# Altium PCB floppy_m0dule.PcbDoc
Units mil, origin at the board's own origin, x right, y up, seen from the top; angles counter-clockwise.
Board outline 1968.5 x 1968.5 mil, 2 copper layers (Top Layer, Bottom Layer); 22 components, 26 nets, 143 pads, 0 vias.
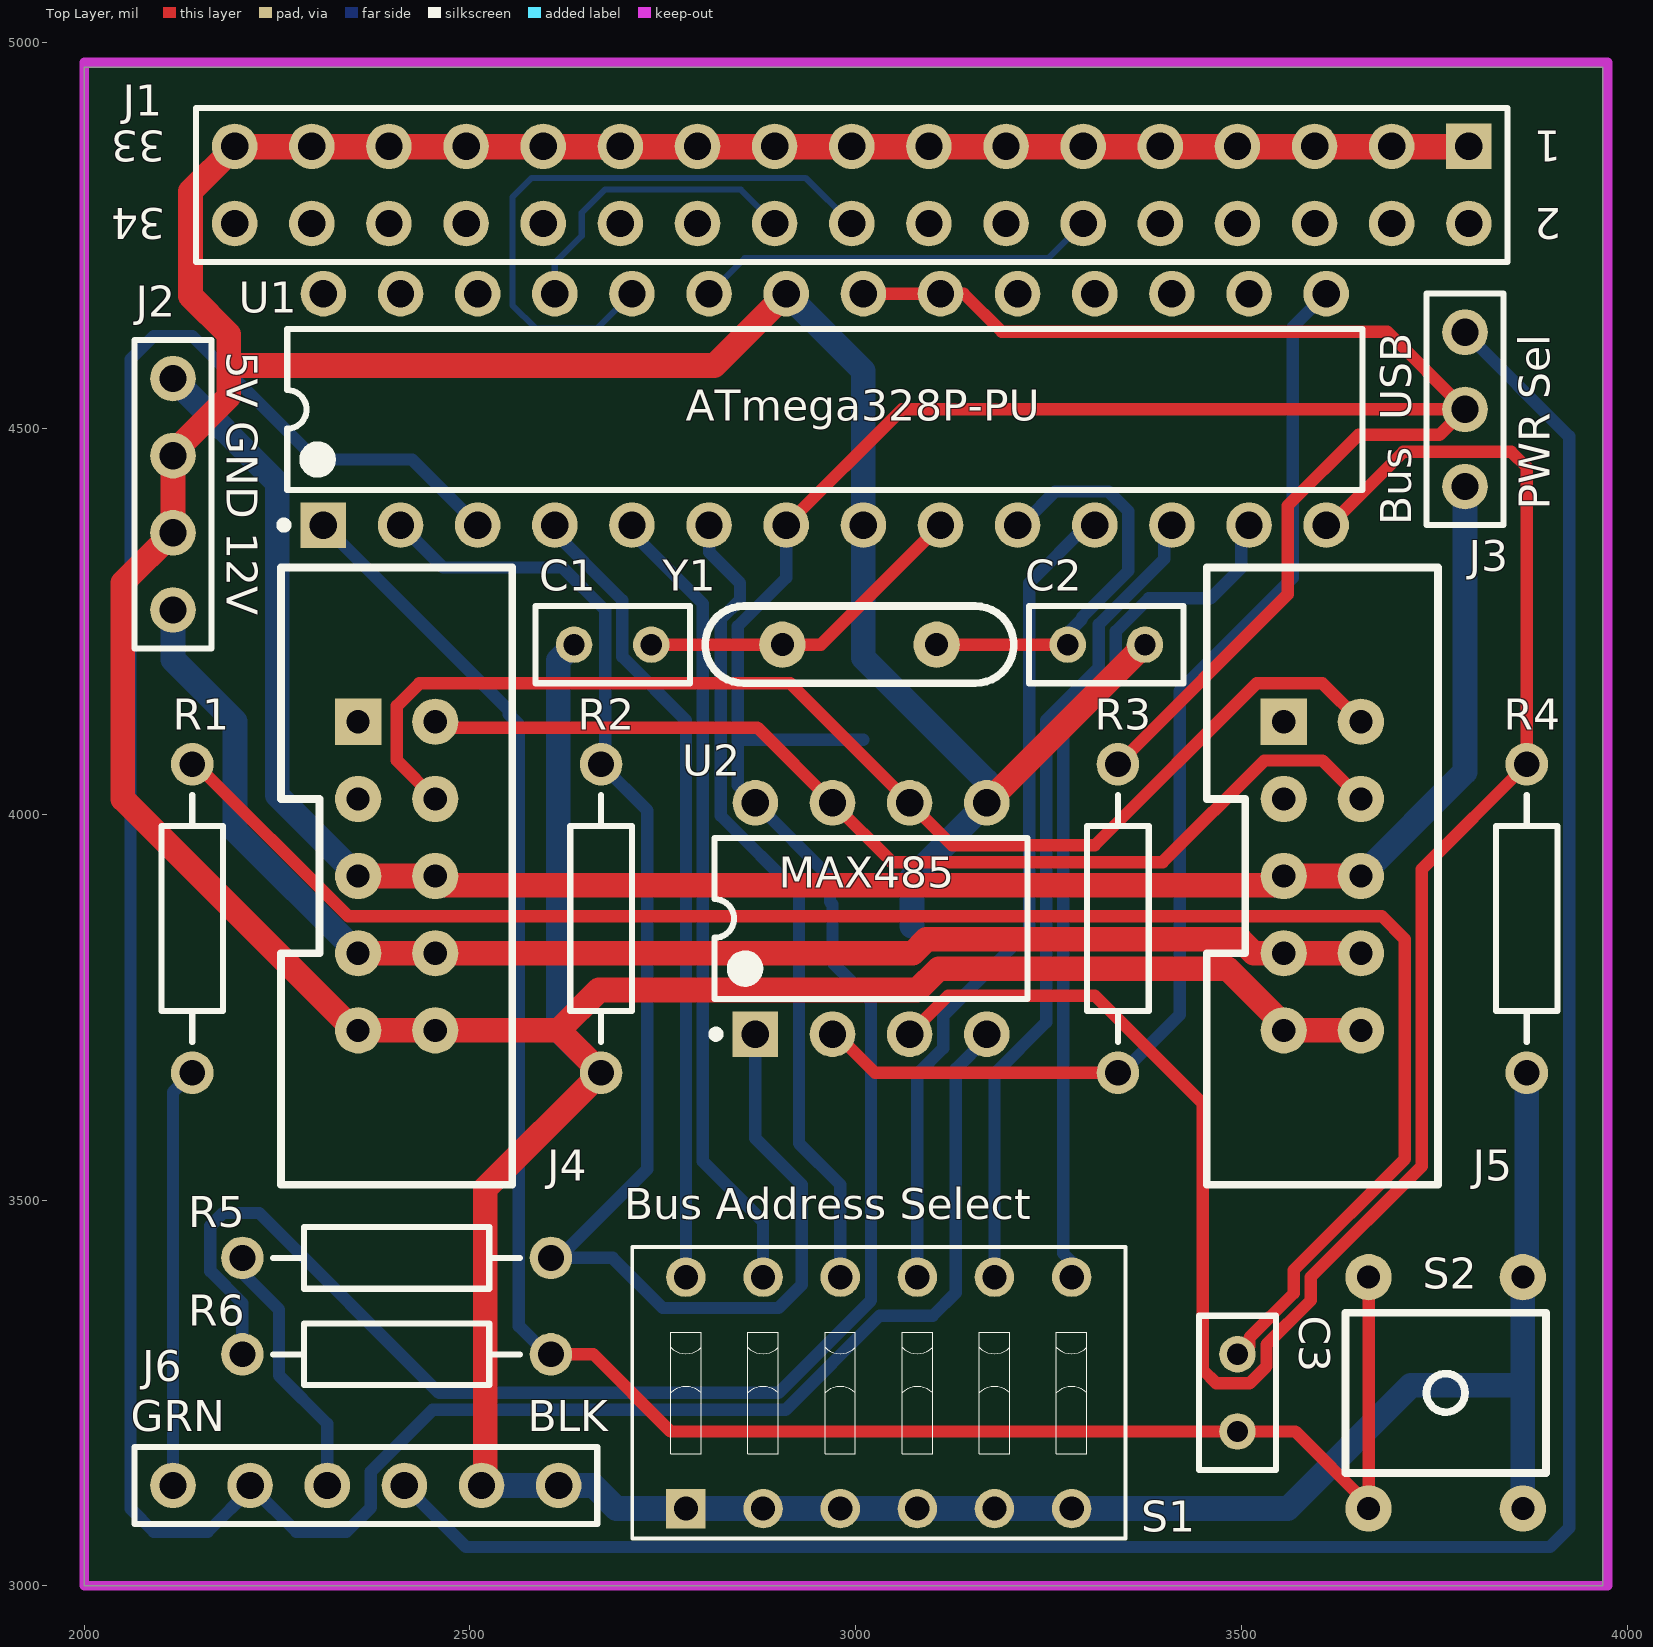
[diagram p0: Top Layer view]
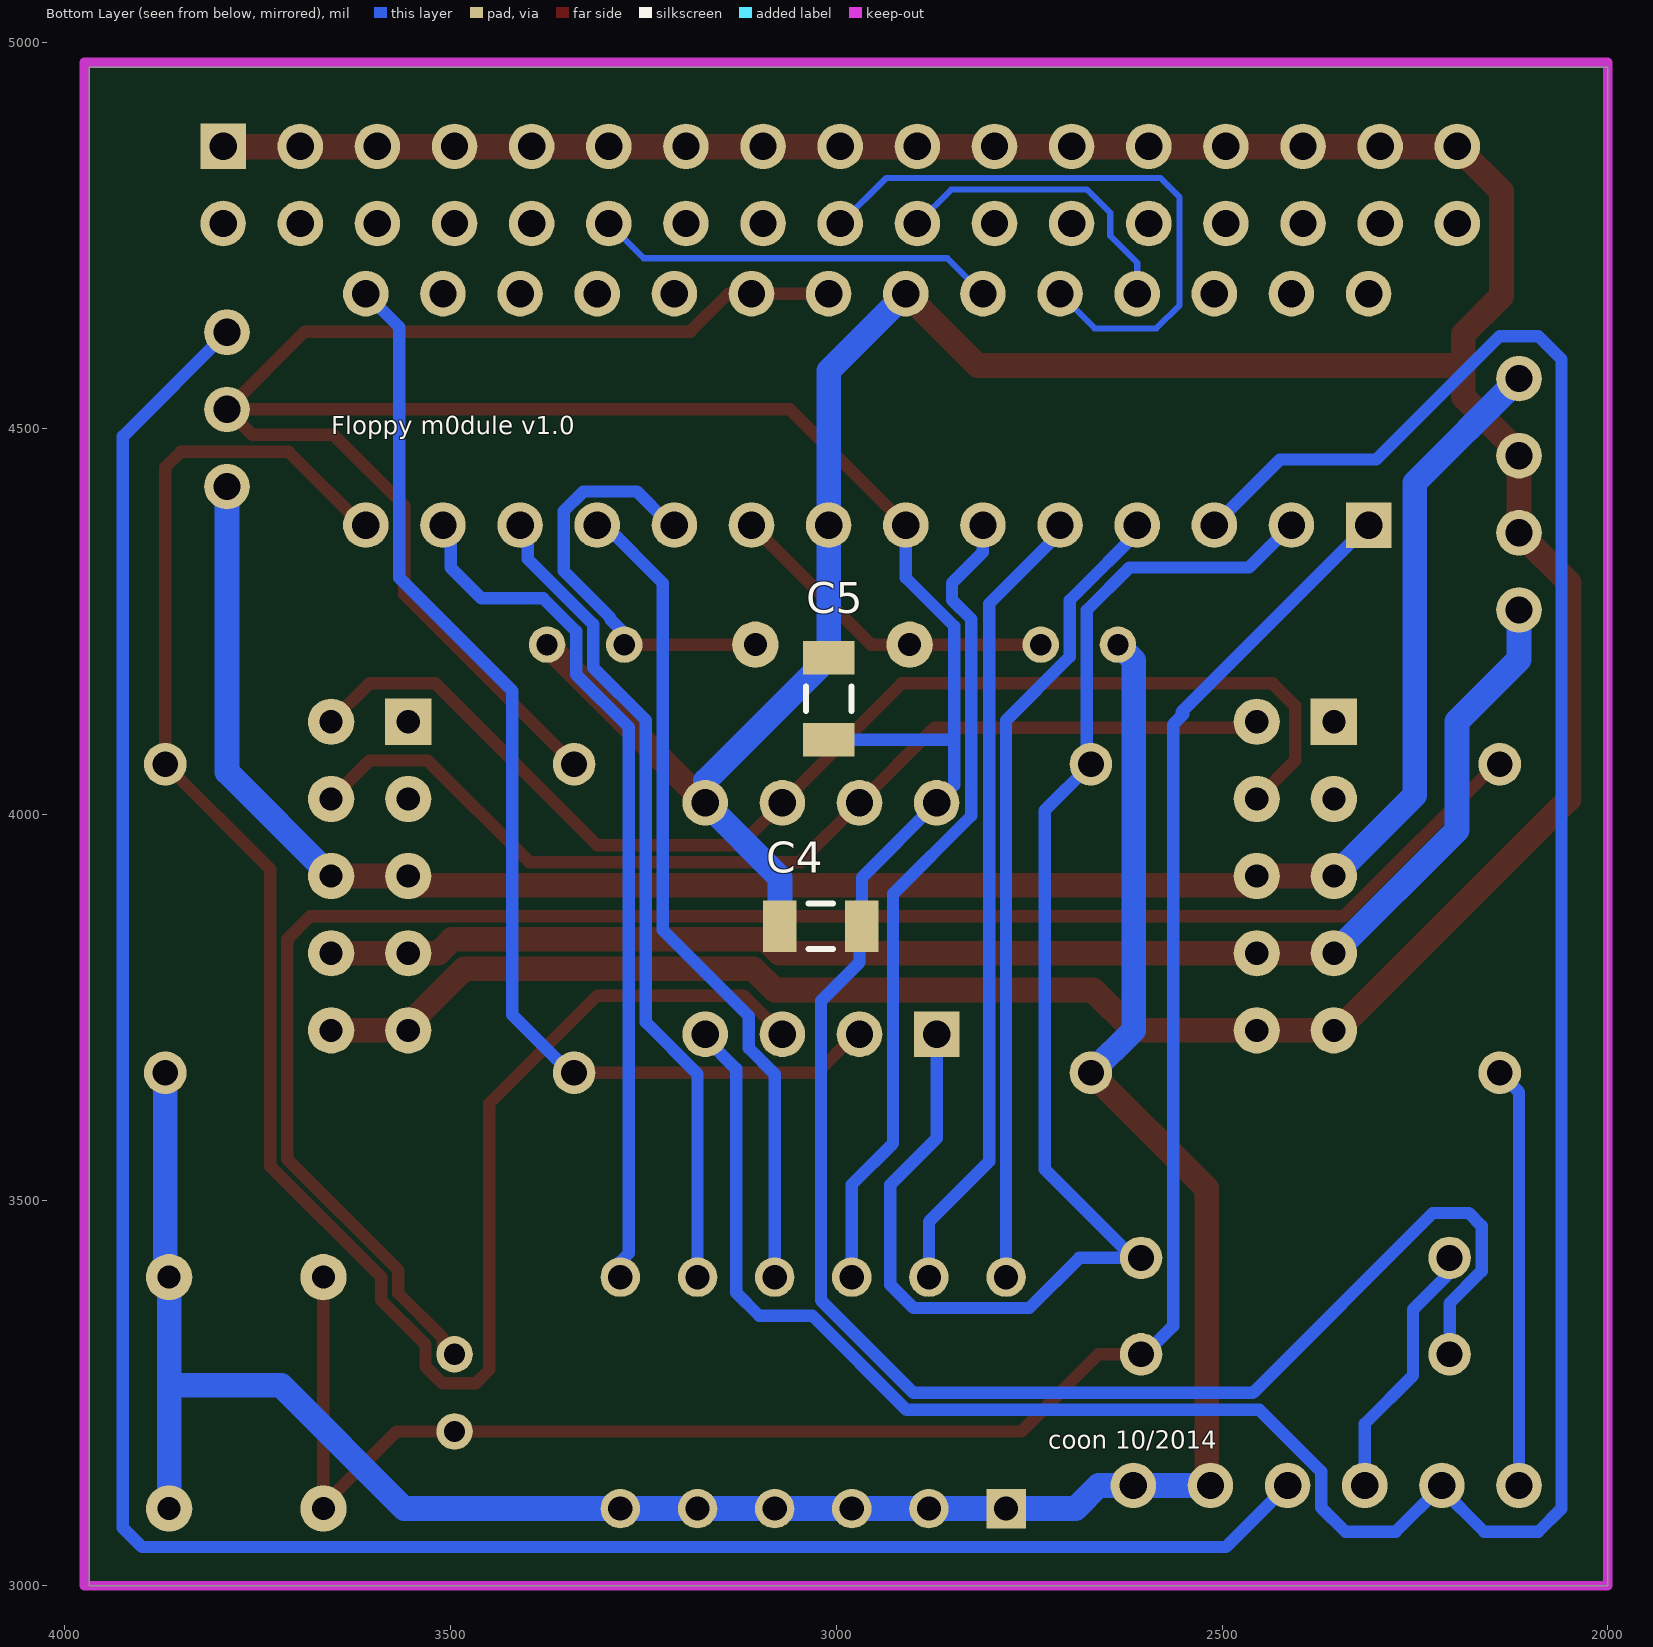
[diagram p1: Bottom Layer view, seen from below]
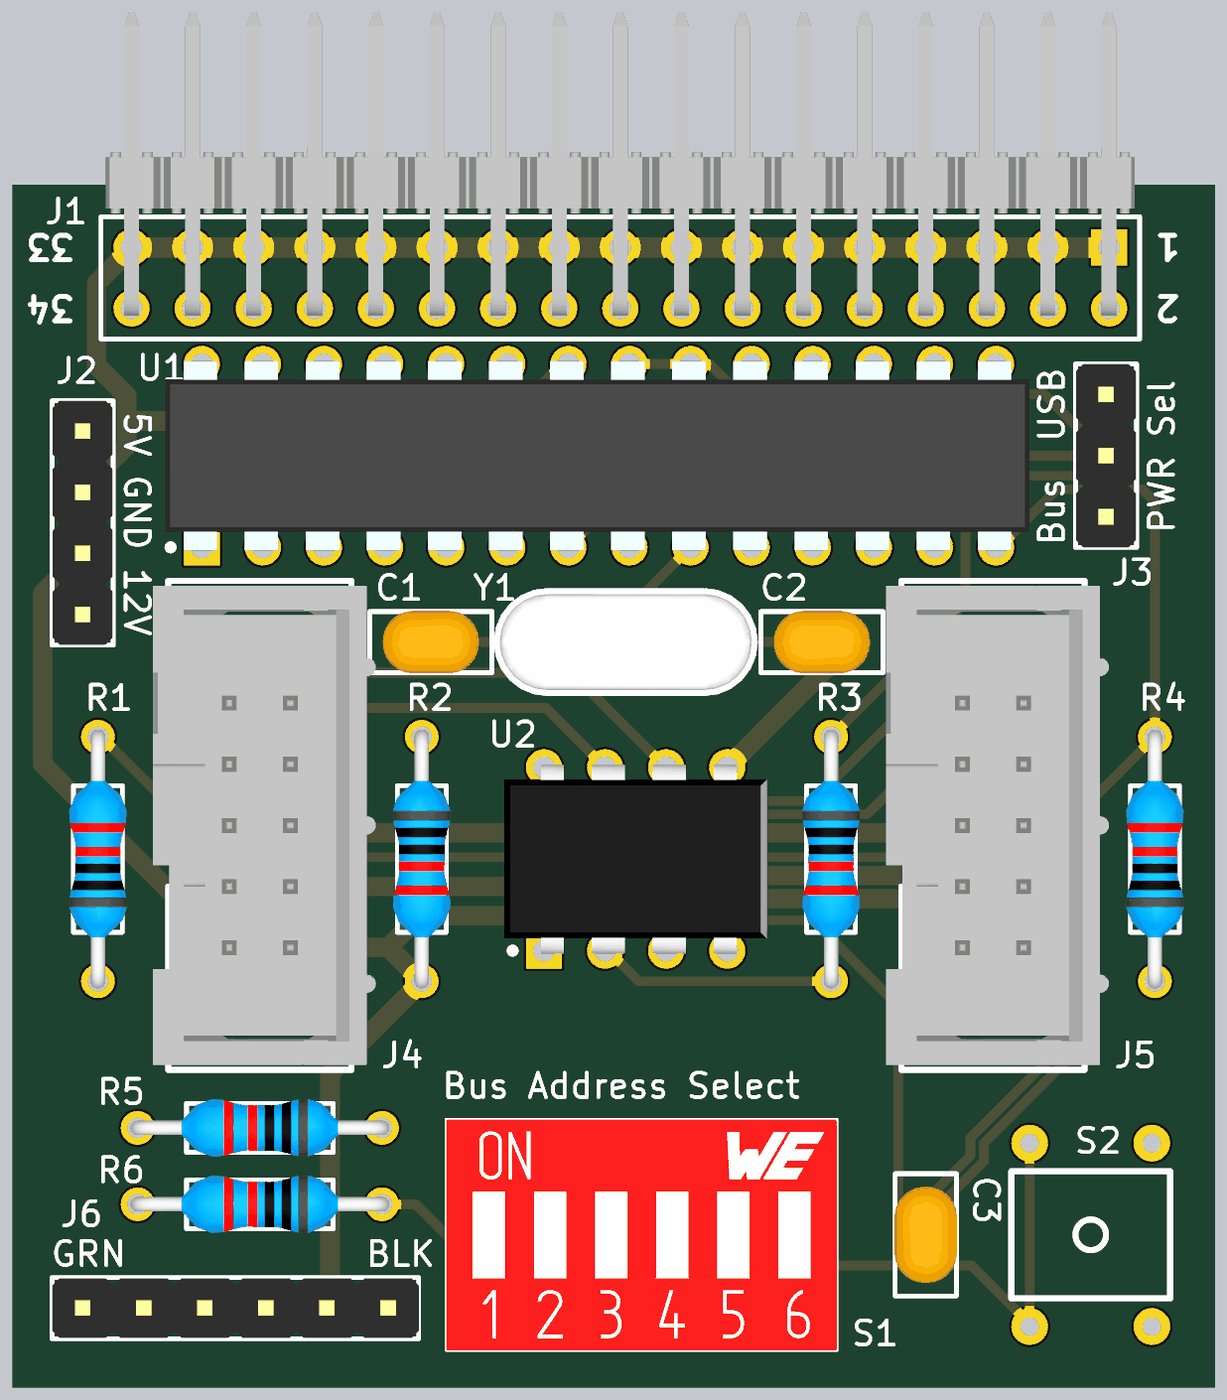
[diagram p2: 3D render of the assembled board from above, using the file's embedded part models]

## Layer stack, top to bottom
Top Solder: solder mask 0.4, Solder Resist, Dk 3.5
Top Layer: signal copper 1.4
Dielectric 1: dielectric 12.6, FR-4, Dk 4.8
Bottom Layer: signal copper 1.4
Bottom Solder: solder mask 0.4, Solder Resist, Dk 3.5

## Board outline
2000,3000 3968.5,3000 3968.5,4968.5 2000,4968.5

## Design rules (kind name [scope] priority, off if disabled: settings)
Clearance [All] p1: gap=6
HoleToHoleClearance [All] p1: gap=6 allowstackedmicrovias=TRUE
MinimumSolderMaskSliver [All] p1: minsoldermaskwidth=5.12
PolygonConnect [All] p1: connectstyle=Relief reliefconductorwidth=10 reliefentries=4 polygonreliefangle="90 Angle" airgapwidth=10
RoutingVias [All] p1: holewidth=31.5 width=62.99 viastyle="Through Hole" minholewidth=28 minwidth=50 maxholewidth=28 maxwidth=50
SilkToSolderMaskClearance [IsPad] p1: minsilkscreentomaskgap=7 clearancetoexposedcopper=TRUE
SolderMaskExpansion [All] p1: expansion=4
Width "Floppy Power Width" [InNetClass('Floppy Power')] p1: maxlimit=32 minlimit=16 preferedwidth=32
Width "Chip Power Width" [InNetClass('Chip Power')] p2: maxlimit=16 minlimit=16 preferedwidth=16 minimp=50.000000 maximp=50.000000 favimp=50.000000
Width [All] p3: maxlimit=24 minlimit=6 preferedwidth=16
26 further rules are at their usual default settings.

## Classes and differential pairs
net class "Floppy Power": "BUS +5V" "BUS +12V" GND
net class "Chip Power": "+5 FTDI" VCC

## Components (designator, comment, footprint, x,y, rotation, side; value= is the part's Value field where it differs from the comment)
C1 "Cap" RAD-0.1 2685,4220 r180 top
C2 "Cap" RAD-0.1 3325,4220 r0 top
C3 "PoR Cap" RAD-0.1 3495,3250 r270 top
C4 "Buffer Cap" C1206 3020,3855 r0 bottom
C5 "Buffer Cap" C1206 3010,4150 r90 bottom
J1 "Shugart Floppy Connector" HDR2X17 3795,4866 r180 top
J2 "Molex Connector" HDR1X4 2115,4565 r270 top
J3 "Power Select Jumper" HDR1X3 3790,4425 r90 top
J4 "Floppy Bus Left" "SHROUDED PINHEADER 2X5" 2355,4120 r0 top
J5 "Floppy Bus Right" "SHROUDED PINHEADER 2X5" 3555,4120 r0 top
J6 "FTDI" HDR1X6 2115,3130 r0 top
R1 "" AXIAL-0.4 2140,3865 r90 top
R2 "Pulldown" AXIAL-0.4 2670,3865 r270 top
R3 "Pullup" AXIAL-0.4 3340,3865 r270 top
R4 "Pulldown" AXIAL-0.4 3870,3865 r90 top
R5 "Shortcut protection" AXIAL-0.4 2405,3425 r180 top
R6 "Pullup" AXIAL-0.4 2405,3300 r180 top
S1 "Bus Address Select" 418117170906 3030,3250 r0 top
S2 "SW-DPST" "PCBComponent_1 - duplicate" 3765,3250 r180 top
U1 "ATmega328P-PU" 28P3 2960,4525 r90 top
U2 "MAX485" PA8 3020,3865 r90 top
Y1 "20Mhz" CRYSTAL 3005,4220 r180 top

## Footprints (in the part's own frame and the unit in brackets; to place one, negate y for a bottom-side part, rotate by r counter-clockwise, add the part's x,y. Pads: shape width x height; smd on the part's side, far side on the other; paste and mask are expansions set on the pad)
28P3 [mm] "DIP, 28-Leads, Row Spacing 7.62mm, Pitch 2.54mm, Body 34.67x7.3mm"
  rect 1.5x1.5 hole 0.9: 1(-3.81,16.51)
  round 1.5 hole 0.9: 2(-3.81,13.97) 3(-3.81,11.43) 4(-3.81,8.89) 5(-3.81,6.35) 6(-3.81,3.81) 7(-3.81,1.27) 8(-3.81,-1.27) 9(-3.81,-3.81) 10(-3.81,-6.35) 11(-3.81,-8.89) 12(-3.81,-11.43) 13(-3.81,-13.97) 14(-3.81,-16.51) 15(3.81,-16.51) 16(3.81,-13.97) 17(3.81,-11.43) 18(3.81,-8.89) 19(3.81,-6.35) 20(3.81,-3.81) 21(3.81,-1.27) 22(3.81,1.27) 23(3.81,3.81) 24(3.81,6.35) 25(3.81,8.89) 26(3.81,11.43) 27(3.81,13.97) 28(3.81,16.51)
  silkscreen extent -3.93,-17.7 2.65,17.93, body extent -3.94,-17.91 3.94,18.03, height 4.57
418117170906 [mm] "06p, 2.54mm Pitch, Horizontal, Box Type, THT, flat Actuator, red, without Tape, Tube"
  rect 1.3x1.3 hole 0.8: 1(-6.35,-3.81)
  round 1.3 hole 0.8: 2(-3.81,-3.81) 3(-1.27,-3.81) 4(1.27,-3.81) 5(3.81,-3.81) 6(6.35,-3.81) 7(6.35,3.81) 8(3.81,3.81) 9(1.27,3.81) 10(-1.27,3.81) 11(-3.81,3.81) 12(-6.35,3.81)
  silkscreen extent -8.12,-4.8 8.12,4.8, body extent -8.12,-4.8 8.12,4.8, height 5.4
AXIAL-0.4 [mm] "Axial Device, Thru-Hole; 2 Leads; 0.4 in Pin Spacing"
  round 1.4 hole 0.85: 1(-5.08,0) 2(5.08,0)
  silkscreen extent -4.06,-1.02 4.06,1.02, body extent -5.38,-1.2 5.38,1.2, height 2.47
C1206 [mm] "Chip Capacitor, Body 3.2x1.6mm, IPC High Density"
  rect 1.1x1.7 smd: 1(1.35,0) 2(-1.35,0)
  silkscreen extent -0.4,-0.75 0.4,0.75, body extent -1.6,-0.8 1.6,0.8, height 1.6
CRYSTAL [mil]
  round 60 hole 30: 1(-100,0) 2(100,0)
  silkscreen extent -200,-50 200,50, body extent -215,-88 217,88, height 142
HDR1X3 [mm] "Connector; Header; 3 Position"
  round 1.5 hole 0.9: 1(0,0) 2(2.54,0) 3(5.08,0)
  silkscreen extent -1.27,-1.27 6.35,1.27, body extent -1.27,-1.24 6.35,1.24, height 8.54
HDR1X4 [mm] "Connector; Header; 4 Position"
  round 1.5 hole 0.9: 1(0,0) 2(2.54,0) 3(5.08,0) 4(7.62,0)
  silkscreen extent -1.27,-1.27 8.89,1.27, body extent -1.27,-1.24 8.89,1.25, height 8.54
HDR1X6 [mm] "Connector; Header; 6 Position"
  round 1.5 hole 0.9: 1(0,0) 2(2.54,0) 3(5.08,0) 4(7.62,0) 5(10.16,0) 6(12.7,0)
  silkscreen extent -1.27,-1.27 13.97,1.27, body extent -1.27,-1.24 13.97,1.25, height 8.54
HDR2X17 [mm] "Connector; Header; 17x2 Position"
  rect 1.5x1.5 hole 0.9: 1(0,0)
  round 1.5 hole 0.9: 2(0,2.54) 3(2.54,0) 4(2.54,2.54) 5(5.08,0) 6(5.08,2.54) 7(7.62,0) 8(7.62,2.54) 9(10.16,0) 10(10.16,2.54) 11(12.7,0) 12(12.7,2.54) 13(15.24,0) 14(15.24,2.54) 15(17.78,0) 16(17.78,2.54) 17(20.32,0) 18(20.32,2.54) 19(22.86,0) 20(22.86,2.54) 21(25.4,0) 22(25.4,2.54) 23(27.94,0) 24(27.94,2.54) 25(30.48,0) 26(30.48,2.54) 27(33.02,0) 28(33.02,2.54) 29(35.56,0) 30(35.56,2.54) 31(38.1,0) 32(38.1,2.54) 33(40.64,0) 34(40.64,2.54)
  silkscreen extent -1.27,-1.27 41.91,3.81, body extent -1.07,-9.78 41.71,2.85, height 5.79
PA8 [mm] "DIP, 8-Leads, Row Spacing 7.62mm, Pitch 2.54mm, Body 9.38x7.24mm"
  rect 1.5x1.5 hole 0.9: 1(-3.81,3.81)
  round 1.5 hole 0.9: 2(-3.81,1.27) 3(-3.81,-1.27) 4(-3.81,-3.81) 5(3.81,-3.81) 6(3.81,-1.27) 7(3.81,1.27) 8(3.81,3.81)
  silkscreen extent -3.93,-5.15 2.65,5.23, body extent -3.93,-5.46 3.94,5.46, height 5.08
"PCBComponent_1 - duplicate" [mil]
  round 60 hole 30: 1(100,-150) 2(-100,-150) 3(100,150) 4(-100,150)
  silkscreen extent -130,-104 130,104
RAD-0.1 [mm] "Radial Cap, Thru-Hole; 2 Leads; 0.1 in Pin Spacing"
  round 1.2 hole 0.7: 1(-1.27,0) 2(1.27,0)
  silkscreen extent -2.54,-1.27 2.54,1.27, body extent -2,-1.31 2,1.3, height 7.46
"SHROUDED PINHEADER 2X5" [mil] "2x5 Shrouded Pinheader"
  rect 60x60 hole 30: 1(0,0)
  round 60 hole 30: 2(100,0) 3(0,-100) 4(100,-100) 5(0,-200) 6(100,-200) 7(0,-300) 8(100,-300) 9(0,-400) 10(100,-400)
  silkscreen extent -100,-600 200,200, body extent -125,-592 240,192, height 367

## Part data
C1 C2: "Capacitor"
C3: library part Cap, "Capacitor"
C4 C5: library part "Cap Semi", "Capacitor (Semiconductor SIM Model)"
J1: library part "Header 17X2", "Header, 17-Pin, Dual row"
J2: "Molex Power Supply Connector"
J3: library part "Header 3H", "Header, 3-Pin, Right Angle"
J4 J5: library part "Floppy Bus Connector", "10 Pin Floppy bus connector for rainbow cable"
J6: library part "Header 6", "Header, 6-Pin"
R1: library part Res2, "Reset Pullup Resistor"
R2 R3 R4 R5 R6: library part Res2, "Resistor"
S1: library part "SW DIP-6", "Midi Channel Select"
S2: "Double-Pole, Single-Throw Switch"
U1: "8-bit AVR Microcontroller, 32KB Flash, 1KB EEPROM, 2KB SRAM, 28-pin PDIP, Industrial Grade (-40°C to 85°C)"
U2: library part MAX485EPA, "Low-Power, Slew-Rate-Limited RS-485/RS-422 Transceiver"
Y1: library part XTAL, "Crystal Oscillator"

## Nets (pads, with @x,y where several pads share a name; then routed paths per layer and width w, separated by ;. In a path a pad name is that pad's centre, name@x,y a point inside that pad or via, vN(x,y) a via of type N, cw(c..) or ccw(c..) an arc to the next point about the centre after c; other vN are vias at no path point)
"+5 FTDI": J3.3 J6.4 | length 3159.3
  Bottom Layer w16: J6.4 2494.81,3050.19 3900.19,3050.19 3925,3075 3925,4490 J3.3
"BUS +5V": J2.1 J3.1 J4.5 J4.6 J5.5 J5.6 | length 2615.3
  Top Layer w32: J4.5 J4.6 2467,3908 3543,3908 J5.5 J5.6
  Bottom Layer w32: J2.1 2250,4430 2250,4025 J4.5 ; J5.6 3790,4055 J3.1
"BUS +12V": J2.4 J4.7 J4.8 J5.7 J5.8 | length 1859.3
  Top Layer w32: J4.7 J4.8 3073.83,3820 3091.83,3838 3498.17,3838 3516.17,3820 J5.7 J5.8
  Bottom Layer w32: J2.4 2115,4200.74 2195.37,4120.37 2195.37,3979.63 J4.7
DIP-1: S1.12 U1.4 | length 1049.6
  Bottom Layer w16: U1.4@2600,4375 2697.38,4277.62 2697.38,4204.42 2780,4121.79 S1.12
DIP-2: S1.11 U1.5 | length 1049.6
  Bottom Layer w16: U1.5@2700,4375 2802,4273 2802,3550 2880,3472 S1.11
DIP-3: S1.10 U1.6 | length 1080.1
  Bottom Layer w16: U1.6@2800,4375 U1.6@2810,4365 ; U1.6 U1.6@2810,4365 ; S1.10 2980,3520 2926.47,3573.53 2926.47,3896.97 2825.19,3998.25 2825.19,4253.06 2850,4277.87 2850,4300 2810,4340 U1.6@2810,4365
DIP-4: S1.9 U1.11 | length 1066.1
  Bottom Layer w16: S1.9 3080,3663.44 3113.53,3696.97 3113.53,3738.53 3225,3850 3225,4300 U1.11@3300,4375
DIP-5: S1.8 U1.12 | length 1071.1
  Bottom Layer w16: S1.8 3180,3663.44 3247,3730.44 3247,4122 3315.38,4190.38 3315.38,4246.49 3400,4331.11 U1.12@3400,4380
DIP-6: S1.7 U1.13 | length 1137.7
  Bottom Layer w16: S1.7 3280,3420 3269,3431 3269,4112.89 3337.38,4181.27 3337.38,4237.38 3380,4280 3460,4280 3500,4320 U1.13@3500,4380 ; U1.13@3512.5,4372.5 U1.13@3520,4380
GND: C1.2 C2.2 C4.1 C5.1 J1.1 J1.3 J1.5 J1.7 J1.9 J1.11 J1.13 J1.15 J1.17 J1.19 J1.21 J1.23 J1.25 J1.27 J1.29 J1.31 J1.33 J2.2 J2.3 J4.9 J4.10 J5.9 J5.10 J6.5 J6.6 R2.2 R4.1 S1.1 S1.2 S1.3 S1.4 S1.5 S1.6 S2.2 S2.4 U1.8 U1.22 U2.5 | length 11194.6
  Top Layer w32: J2.3@2110,4370 2115,4375 J2.2 2115,4468.91 2187.34,4541.25 2187.34,4581.79 ; J2.3 2050,4300 2050,4020 J4.9@2350,3720 ; J1.33 J1.31 J1.29 J1.27 J1.25 J1.23 J1.21 J1.19 J1.17 J1.15 J1.13 J1.11 J1.9 J1.7 J1.5 J1.3 3794,4866 3795,4865 2195,4865 2137.66,4807.66 2137.66,4672.02 2187.34,4622.34 2187.34,4581.79 ; J4.9 J4.10 2615,3720 ; J6.5@2520,3130 2520,3515 R2.2 2615,3720 ; U1.22 2816.79,4581.79 2187.34,4581.79 ; U2.5 C2.2 ; J5.10 J5.9 3555,3727.43 3482.43,3800 3107.57,3800 3079.91,3772.34 2667.34,3772.34 2615,3720
  Bottom Layer w32: J6.5 J6.6@2610,3130 ; J6.6 2660,3130 2690,3100 S1.1@2770,3100 ; C1.2 2614.63,4199.63 2614.63,3720.37 R2.2 ; S1.1 S1.2 S1.3 S1.4 S1.5 S1.6 3560,3100 3720,3260 3860,3260 ; U1.22 3010,4575 U1.8 C5.1 3170,4043.15 U2.5 3073.15,3918.15 C4.1@3073.15,3855 ; S2.4 S2.2 3870,3405 R4.1
NetC1_1: C1.1 U1.9 Y1.2 | length 439.2
  Top Layer w16: C1.1@2730,4220 Y1.2 ; Y1.2@2910,4220 2955,4220 U1.9
NetC2_1: C2.1 U1.10 Y1.1 | length 536.8
  Top Layer w16: Y1.1 C2.1@3270,4220
  Bottom Layer w16: U1.10@3220,4380 3258.53,4418.53 3328.03,4418.53 3353.53,4393.03 3353.53,4315.75 3293.38,4255.6 3293.38,4253.38 C2.1@3260,4220
NetC3_1: C3.1 R1.2 | length 2293.9
  Top Layer w16: R1.2@2140,4070 2342,3868 3682,3868 3712,3838 3712,3553.11 3568,3409.11 3568,3379.11 3510.62,3321.73 3510.62,3310.62 C3.1@3500,3300
NetC3_2: C3.2 R6.1 S2.1 S2.3 U1.1 | length 2640
  Top Layer w16: R6.1 2660,3300 2760,3200 C3.2 3570,3200 S2.3@3665,3105 ; S2.1 S2.3@3665,3105 ; S2.3@3670,3100 S2.3@3665,3105
  Bottom Layer w16: U1.1 2552.5,4132.5 ; 2550,4130 2563.44,4116.56 2563.44,3336.56 R6.1@2600,3300 ; R6.1@2602.5,3302.5 R6.1
NetJ1_12: J1.12 U1.23 | length 522.7
  Bottom Layer w8: U1.23 2856,4721 3250,4721 J1.12
NetJ1_18: J1.18 U1.24 | length 810.9
  Bottom Layer w8: U1.24 2665,4630 2585,4630 2555,4660 2555,4800 2580,4825 2935,4825 2994,4766 J1.18 ; J1.18@2985,4765 J1.18@2995,4765
NetJ1_20: J1.20 U1.25 | length 400.1
  Bottom Layer w8: U1.25 2610,4715 2645,4750 2645,4780 2675,4810 2851,4810 J1.20
NetJ6_1: J6.1 R1.1 | length 545.4
  Bottom Layer w16: J6.1 2115,3640 R1.1
NetJ6_2: J6.2 U1.3 U2.4 | length 3704.8
  Top Layer w16: J6.2 J6.2@2230,3130
  Bottom Layer w16: J6.2 J6.2@2217.5,3127.5 ; U1.3 2425,4460 2300,4460 2140,4620 2090,4620 2060,4590 2060,3100 2090,3070 2160,3070 J6.2@2217.5,3127.5 ; U2.4@3170,3710 3130,3670 3130,3380 3100,3350 3031.11,3350 2909.11,3228 2451.44,3228 2371.47,3148.03 2371.47,3101.47 2340,3070 2275,3070 J6.2@2217.5,3127.5
NetJ6_3: J6.3 R5.2 | length 340.6
  Bottom Layer w16: R5.2 2205,3405.44 2252.37,3358.07 2252.37,3272.63 2315,3210 J6.3
NetR2_1: R2.1 R5.1 U1.2 U2.1 | length 1929.9
  Bottom Layer w16: U1.2 2465,4320 2620,4320 2675.38,4264.62 R2.1@2675.38,4074.62 ; R5.1 R5.1@2615,3425 ; R5.1@2610,3420 R5.1@2615,3425 ; R2.1 2730,4005 2730,3540 R5.1@2615,3425 ; U2.1@2870,3710 2870,3580 2930,3520 2930,3390 2900,3360 2750,3360 2685,3425 R5.1@2615,3425
NetR3_2: R3.2 U1.15 U2.2 | length 1515.5
  Top Layer w16: U2.2@2970,3710 2980,3710 3025,3665 R3.2
  Bottom Layer w16: R3.2@3340,3660 3420,3740 3420,4160 3566.47,4306.47 3566.47,4631.47 U1.15
NetR4_2: R4.2 U1.14 U2.3 | length 2522.8
  Top Layer w16: U2.3 3120,3765 3310,3765 3450,3625 3450,3280 3467.62,3262.38 3510.58,3262.38 3532.62,3284.42 3532.62,3312.62 3590,3370 3590,3400 3734,3544 3734,3929 R4.2 3870,4450 3850,4470 3710,4470 U1.14@3610,4370
  Bottom Layer w16: R4.2@3880,4060 R4.2@3880,4065
"RS485 A": J4.4 J5.2 U2.6 | length 1597.6
  Top Layer w16: J4.4 2405.19,4069.81 2405.19,4140.63 2434.37,4169.81 2915.19,4169.81 U2.6 3125,3960 3310,3960 3519.81,4169.81 3605.19,4169.81 J5.2
"RS485 B": J4.2 J5.4 U2.7 | length 1350.6
  Top Layer w16: J4.2 2462.63,4112.37 2872.63,4112.37 U2.7 3047,3938 3398,3938 3529.81,4069.81 3605.19,4069.81 J5.4
VCC: C4.2 C5.2 J3.2 R3.1 R6.2 U1.7 U1.20 U1.21 U2.8 | length 4951.8
  Top Layer w16: U1.7 3060,4525 J3.2 ; U1.21 U1.20 3140.22,4675 3189.56,4625.66 3689.34,4625.66 J3.2 ; R3.1 3560,4285 3560,4400 3652,4492 3757,4492 J3.2
  Bottom Layer w16: R6.2 2205,3366.23 2163.44,3407.79 2163.44,3466.56 2180,3483.12 2226.88,3483.12 2460,3250 2900,3250 3020,3370 3020,3758.15 2970,3808.15 ; U1.7 2910,4306.76 2847.19,4243.95 2847.19,4100 ; 2970.92,3809.08 2970,3810 2970,3883.43 2966.85,3886.57 2966.85,3918.15 U2.8 2847.19,4037.81 2847.19,4100 ; C5.2 2850.34,4096.85 2847.19,4100
pads on no net: J1.2 J1.4 J1.6 J1.8 J1.10 J1.14 J1.16 J1.22 J1.24 J1.26 J1.28 J1.30 J1.32 J1.34 J4.1 J4.3 J5.1 J5.3 U1.16 U1.17 U1.18 U1.19 U1.26 U1.27 U1.28

## Keep-outs
Keep-Out Layer:
  lines w11.81: 2000,3000 3975,3000 3975,4975 2000,4975 2000,3000

## Silkscreen, mask and mechanical layers (free items; w line width, h text height)
Top Overlay:
  text "5V GND 12V" at 2185,4600 h40 r270
  text "PWR Sel" at 3900,4395 h40 r90
  text "Bus  USB" at 3720,4375 h40 r90
  text "GRN" at 2060,3200 h40
  text "BLK" at 2575,3200 h40
Bottom Overlay:
  text "Floppy m0dule v1.0" at 3655,4485 h40
  text "coon 10/2014" at 2725,3170 h40

## Dimensions
2000,3000 to 3975,3000 on Mechanical 1
2000,3000 to 2000,4975 on Mechanical 1

## Text inside footprints (layer, text, board x,y; h text height)
J1: Top Overlay "2" at 3915,4786 h40 r180; Top Overlay "1" at 3915,4886 h40 r180; Top Overlay "33" at 2105,4886 h40 r180; Top Overlay "34" at 2105,4786 h40 r180